# Altium PCB Project.PcbDoc (part 5 of 5)
Units mm, origin at the board's own origin, x right, y up, seen from the top; angles counter-clockwise.
Board outline 95 x 65 mm, 6 copper layers (Top Layer, L2 - GND, L3 - PWR, L4 - Sig, L5 - GND, Bottom Layer), stack 1.538 mm thick; 346 components, 317 nets, 1244 pads, 645 vias.
Unrouted connection lines stored in the file: 109.
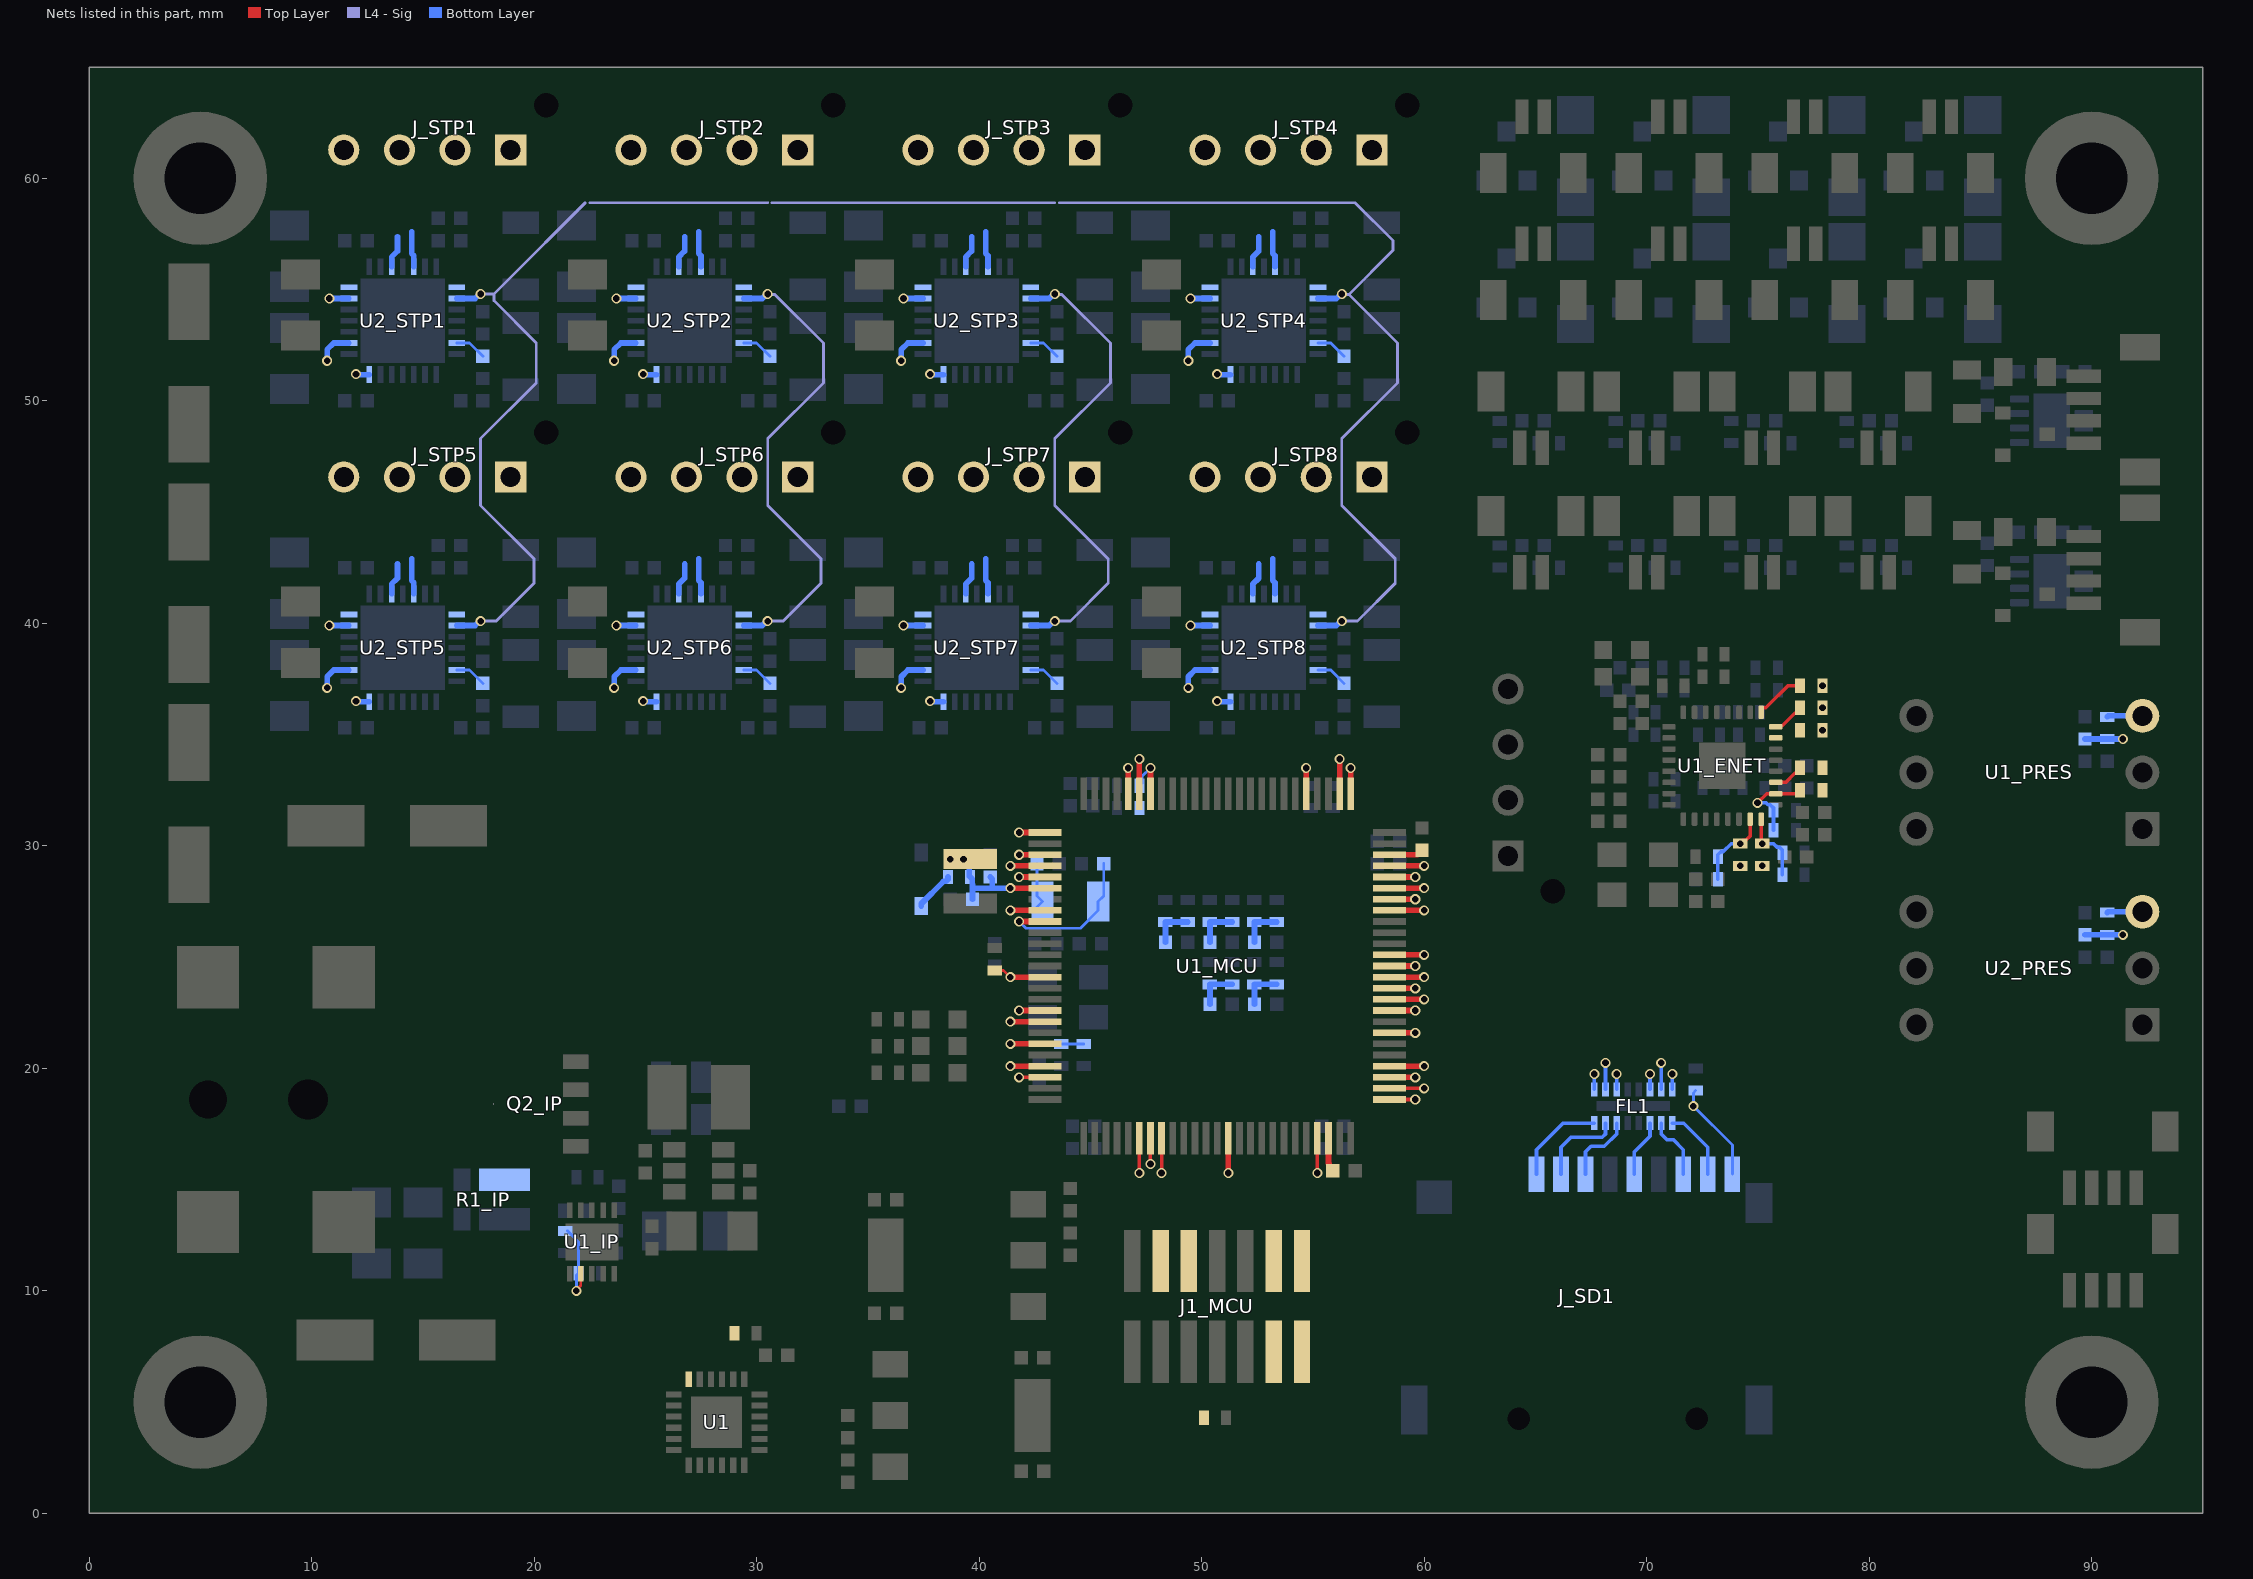
[diagram p7: the nets of this part, all layers, seen from the top]

## Via types
v1: diameter 0.45, hole 0.3, Top Layer to Bottom Layer, tented both sides, 633 vias
v2: diameter 0.55, hole 0.4, Top Layer to Bottom Layer, tented both sides, 12 vias

## Nets (pads, with @x,y where several pads share a name; then routed paths per layer and width w, separated by ;. In a path a pad name is that pad's centre, name@x,y a point inside that pad or via, vN(x,y) a via of type N, cw(c..) or ccw(c..) an arc to the next point about the centre after c; other vN are vias at no path point) (continued)
IP_UV: R2_IP.1 R4_IP.2 U1_IP.2 | length 3.8
  Top Layer w0.127: v1(21.9,10) 21.9,10.034 22.1,10.234 U1_IP.2@22.1,10.775
  Bottom Layer w0.127: R2_IP.1@21.5,12.7 22,12.2 R4_IP.2@22,10.8 21.9,10.7 v1(21.9,10)
IP_VOUT_R: Q2_IP.5 R1_IP.1
LED_RING1: U1_MCU.53 | length 1.2
  Top Layer w0.254: U1_MCU.53@58.438,19.6 v1(59.6,19.6)
LED_RING2: U1_MCU.54 | length 1.6
  Top Layer w0.254: U1_MCU.54@58.438,20.1 v1(60,20.1)
MCU_BOOT0: R5_MCU.1 R6_MCU.2 U1_MCU.94 | length 3.2
  Top Layer w0.254: U1_MCU.94@47.7,32.338 v1(47.7,33.5)
  Bottom Layer w0.127: R6_MCU.2@47.2,31.7 R5_MCU.1@47.2,32.7 47.333,32.833 47.333,33.133 v1(47.7,33.5)
MCU_RST_L: J1_MCU.12 R4_MCU.1 U1_MCU.14 | length 2.4
  Top Layer w0.127: R4_MCU.1@40.7,24.4 41.1,24.4 v1(41.4,24.1)
  Top Layer w0.254: v1(41.4,24.1) U1_MCU.14@42.962,24.1
MCU_VCAP: C7_MCU.2 C8_MCU.2 U1_MCU.48 U1_MCU.73 | length 4.3
  Top Layer w0.254: U1_MCU.48@55.7,16.862 55.7,15.743 55.727,15.716 55.727,15.573 C8_MCU.2@55.9,15.4 ; C7_MCU.2@59.6,29.6 U1_MCU.73@58.438,29.6 59.7,29.6 C7_MCU.2@59.9,29.8
OSC32_IN: C2_MCU.2 U1_MCU.8 Y1_MCU.1 | length 5
  Top Layer w0.254: v1(41.4,27.1) U1_MCU.8@42.962,27.1
  Bottom Layer w0.127: v1(41.4,27.1) 42.45,27.1 Y1_MCU.1@42.85,27.5 42.6,27.75 C2_MCU.2@42.6,29.2
OSC32_OUT: C3_MCU.2 U1_MCU.9 Y1_MCU.2 | length 7.4
  Top Layer w0.254: v1(41.8,26.6) U1_MCU.9@42.962,26.6
  Bottom Layer w0.127: v1(41.8,26.6) 42.1,26.3 44.55,26.3 45.35,27.1 Y1_MCU.2@45.35,27.5 45.6,27.75 C3_MCU.2@45.6,29.2
OUT_1N_STP1: J_STP1.4 U2_STP1.21
OUT_1N_STP2: J_STP2.4 U2_STP2.21
OUT_1N_STP3: J_STP3.4 U2_STP3.21
OUT_1N_STP4: J_STP4.4 U2_STP4.21
OUT_1N_STP5: J_STP5.4 U2_STP5.21
OUT_1N_STP6: J_STP6.4 U2_STP6.21
OUT_1N_STP7: J_STP7.4 U2_STP7.21
OUT_1N_STP8: J_STP8.4 U2_STP8.21
OUT_1P_STP1: J_STP1.3 U2_STP1.24 | length 1.5
  Bottom Layer w0.254: U2_STP1.24@13.6,56.024 13.6,56.46 13.865,56.724 13.865,57.365
OUT_1P_STP2: J_STP2.3 U2_STP2.24 | length 1.5
  Bottom Layer w0.254: U2_STP2.24@26.5,56.023 26.5,56.46 26.765,56.724 26.765,57.365
OUT_1P_STP3: J_STP3.3 U2_STP3.24 | length 1.5
  Bottom Layer w0.254: U2_STP3.24@39.4,56.023 39.4,56.46 39.665,56.724 39.665,57.365
OUT_1P_STP4: J_STP4.3 U2_STP4.24 | length 1.5
  Bottom Layer w0.254: U2_STP4.24@52.3,56.023 52.3,56.46 52.565,56.724 52.565,57.365
OUT_1P_STP5: J_STP5.3 U2_STP5.24 | length 1.5
  Bottom Layer w0.254: U2_STP5.24@13.6,41.324 13.6,41.76 13.865,42.024 13.865,42.665
OUT_1P_STP6: J_STP6.3 U2_STP6.24 | length 1.5
  Bottom Layer w0.254: U2_STP6.24@26.5,41.323 26.5,41.76 26.765,42.024 26.765,42.665
OUT_1P_STP7: J_STP7.3 U2_STP7.24 | length 1.5
  Bottom Layer w0.254: U2_STP7.24@39.4,41.323 39.4,41.76 39.665,42.024 39.665,42.665
OUT_1P_STP8: J_STP8.3 U2_STP8.24 | length 1.5
  Bottom Layer w0.254: U2_STP8.24@52.3,41.323 52.3,41.76 52.565,42.024 52.565,42.665
OUT_2N_STP1: J_STP1.1 U2_STP1.1
OUT_2N_STP2: J_STP2.1 U2_STP2.1
OUT_2N_STP3: J_STP3.1 U2_STP3.1
OUT_2N_STP4: J_STP4.1 U2_STP4.1
OUT_2N_STP5: J_STP5.1 U2_STP5.1
OUT_2N_STP6: J_STP6.1 U2_STP6.1
OUT_2N_STP7: J_STP7.1 U2_STP7.1
OUT_2N_STP8: J_STP8.1 U2_STP8.1
OUT_2P_STP1: J_STP1.2 U2_STP1.26 | length 1.6
  Bottom Layer w0.254: 14.5,57.6 14.5,56.623 14.6,56.523 U2_STP1.26@14.6,56.023
OUT_2P_STP2: J_STP2.2 U2_STP2.26 | length 1.6
  Bottom Layer w0.254: 27.4,57.6 27.4,56.623 27.5,56.523 U2_STP2.26@27.5,56.023
OUT_2P_STP3: J_STP3.2 U2_STP3.26 | length 1.6
  Bottom Layer w0.254: 40.3,57.6 40.3,56.623 40.4,56.523 U2_STP3.26@40.4,56.024
OUT_2P_STP4: J_STP4.2 U2_STP4.26 | length 1.6
  Bottom Layer w0.254: 53.2,57.6 53.2,56.623 53.3,56.523 U2_STP4.26@53.3,56.023
OUT_2P_STP5: J_STP5.2 U2_STP5.26 | length 1.6
  Bottom Layer w0.254: 14.5,42.9 14.5,41.923 14.6,41.823 U2_STP5.26@14.6,41.323
OUT_2P_STP6: J_STP6.2 U2_STP6.26 | length 1.6
  Bottom Layer w0.254: 27.4,42.9 27.4,41.923 27.5,41.823 U2_STP6.26@27.5,41.323
OUT_2P_STP7: J_STP7.2 U2_STP7.26 | length 1.6
  Bottom Layer w0.254: 40.3,42.9 40.3,41.923 40.4,41.823 U2_STP7.26@40.4,41.324
OUT_2P_STP8: J_STP8.2 U2_STP8.26 | length 1.6
  Bottom Layer w0.254: 53.2,42.9 53.2,41.923 53.3,41.823 U2_STP8.26@53.3,41.323
PHY_INT: U1_MCU.69 | length 1.2
  Top Layer w0.254: U1_MCU.69@58.438,27.6 v1(59.6,27.6)
PHY_RST: U1_MCU.57 | length 1.2
  Top Layer w0.254: U1_MCU.57@58.438,21.6 v1(59.6,21.6)
PLC_IO_EXP_RST_L: R1.1 U1.24
PRES1_OUT_R: R1_PRES.2 U1_PRES.3 | length 1.6
  Bottom Layer w0.254: R1_PRES.2@90.7,35.8 90.74,35.84 U1_PRES.3@92.28,35.84
PRES2_OUT_R: R2_PRES.2 U2_PRES.3 | length 1.6
  Bottom Layer w0.254: R2_PRES.2@90.7,27 90.74,27.04 U2_PRES.3@92.28,27.04
PRES_1: C2_PRES.2 R1_PRES.1 | length 1.7
  Bottom Layer w0.254: C2_PRES.2@89.7,34.8 R1_PRES.1@90.7,34.8 v1(91.4,34.8)
PRES_2: C4_PRES.2 R2_PRES.1 | length 1.7
  Bottom Layer w0.254: C4_PRES.2@89.7,26 R2_PRES.1@90.7,26 v1(91.4,26)
PRGMR_DETECT: J1_MCU.11 R13_MCU.1
RMII_MAC_TO_PHY_D0: R3_ENET.2 U1_MCU.51 | length 1.2
  Top Layer w0.161: U1_MCU.51@58.438,18.6 v1(59.6,18.6)
  other v1: 77.9,36.2
RMII_MAC_TO_PHY_D0_R: R3_ENET.1 U1_ENET.24 | length 1.5
  Top Layer w0.161: U1_ENET.24@75.8,35.35 75.845,35.395 76.095,35.395 76.655,35.955 76.755,35.955 76.9,36.1 R3_ENET.1@76.9,36.2
RMII_MAC_TO_PHY_D1: R4_ENET.2 U1_MCU.52 | length 1.6
  Top Layer w0.161: U1_MCU.52@58.438,19.1 v1(60,19.1)
  other v1: 77.9,37.2
RMII_MAC_TO_PHY_D1_R: R4_ENET.1 U1_ENET.25 | length 2.3
  Top Layer w0.161: U1_ENET.25@75.15,36 75.15,36.163 75.195,36.208 75.358,36.208 76.35,37.2 R4_ENET.1@76.9,37.2
RMII_MAC_TO_PHY_EN: R2_ENET.2 U1_MCU.47 | length 1.6
  Top Layer w0.161: v1(55.2,15.3) U1_MCU.47@55.2,16.862
  other v1: 77.9,35.2
RMII_MAC_TO_PHY_EN_R: R2_ENET.1 U1_ENET.23
RMII_PHY_TO_MAC_CLK: R7_ENET.2 U1_MCU.23 | length 1.2
  Top Layer w0.161: v1(41.8,19.6) U1_MCU.23@42.962,19.6
RMII_PHY_TO_MAC_CLK_R: R7_ENET.1 U1_ENET.19 | length 1.4
  Top Layer w0.161: U1_ENET.19@75.8,32.85 76.25,32.85 76.655,33.255 76.755,33.255 76.9,33.4 R7_ENET.1@76.9,33.5
RMII_PHY_TO_MAC_D0: R9_ENET.2 U1_MCU.32 | length 1.2
  Top Layer w0.161: v1(47.7,15.7) U1_MCU.32@47.7,16.862
  other v1: 75.2,29.1
RMII_PHY_TO_MAC_D0_R: R9_ENET.1 R25_ENET.1 R35_ENET.2 U1_ENET.16 | length 3.2
  Top Layer w0.161: U1_ENET.16@75.15,31.2 75.15,30.15 v1(75.2,30.1)
  Bottom Layer w0.161: v1(75.2,30.1) 75.7,30.1 75.855,29.945 75.955,29.945 76.1,29.8 R25_ENET.1@76.1,29.7 R35_ENET.2@76.1,28.7
RMII_PHY_TO_MAC_D1: R10_ENET.2 U1_MCU.33 | length 1.6
  Top Layer w0.161: v1(48.2,15.3) U1_MCU.33@48.2,16.862
  other v1: 74.2,29.1
RMII_PHY_TO_MAC_D1_R: R10_ENET.1 R19_ENET.1 R29_ENET.2 U1_ENET.15 | length 3.7
  Top Layer w0.161: v1(74.2,30.1) 74.345,30.245 74.45,30.245 74.65,30.444 U1_ENET.15@74.65,31.2
  Bottom Layer w0.161: R29_ENET.2@73.2,28.5 R19_ENET.1@73.2,29.5 73.2,29.6 73.345,29.745 73.445,29.745 73.8,30.1 v1(74.2,30.1)
RMII_PHY_TO_MAC_DV: R6_ENET.2 U1_MCU.31 | length 1.6
  Top Layer w0.161: v1(47.2,15.3) U1_MCU.31@47.2,16.862
RMII_PHY_TO_MAC_DV_R: R6_ENET.1 R21_ENET.1 R31_ENET.2 U1_ENET.18 | length 4
  Top Layer w0.161: v1(74.982,31.935) 75.391,32.344 75.794,32.344 U1_ENET.18@75.8,32.35 76.755,32.35 76.9,32.495 R6_ENET.1@76.9,32.5
  Bottom Layer w0.161: v1(74.982,31.935) 75.365,31.935 75.455,31.845 75.555,31.845 75.7,31.7 R31_ENET.2@75.7,30.7
SD_CD_L: J_SD1.9 R51.1 | length 4.5
  Bottom Layer w0.127: R51.1@72.2,19 72.1,18.9 v1(72.1,18.3) 73.85,16.55 J_SD1.9@73.85,15.25
SD_CLK: FL1.14 | length 0.7
  Bottom Layer w0.161: FL1.14@70.15,19.06 v1(70.15,19.75)
SD_CLK_R: FL1.3 J_SD1.5 | length 2.6
  Bottom Layer w0.161: J_SD1.5@69.45,15.25 69.45,16.25 70.15,16.95 FL1.3@70.15,17.54
SD_CMD: FL1.11 | length 0.7
  Bottom Layer w0.161: FL1.11@68.65,19.06 v1(68.65,19.75)
SD_CMD_R: FL1.6 J_SD1.3 | length 3.2
  Bottom Layer w0.161: J_SD1.3@67.25,15.25 67.25,16.25 67.5,16.5 68.1,16.5 68.65,17.05 FL1.6@68.65,17.54
SD_DATA0: FL1.15 | length 1.2
  Bottom Layer w0.161: FL1.15@70.65,19.06 v1(70.65,20.25)
SD_DATA0_R: FL1.2 J_SD1.7 | length 2.9
  Bottom Layer w0.161: FL1.2@70.65,17.54 70.65,17.05 70.9,16.8 71.2,16.8 71.65,16.35 J_SD1.7@71.65,15.25
SD_DATA1: FL1.16 | length 0.7
  Bottom Layer w0.161: FL1.16@71.15,19.06 v1(71.15,19.75)
SD_DATA1_R: FL1.1 J_SD1.8 | length 3.3
  Bottom Layer w0.161: FL1.1@71.15,17.54 71.66,17.54 72.75,16.45 J_SD1.8@72.75,15.25
SD_DATA2: FL1.9 | length 0.7
  Bottom Layer w0.161: FL1.9@67.65,19.06 v1(67.65,19.75)
SD_DATA2_R: FL1.8 J_SD1.1 | length 4.2
  Bottom Layer w0.161: J_SD1.1@65.05,15.25 65.05,16.35 66.24,17.54 FL1.8@67.65,17.54
SD_DATA3: FL1.10 | length 1.2
  Bottom Layer w0.161: FL1.10@68.15,19.06 v1(68.15,20.25)
SD_DATA3_R: FL1.7 J_SD1.2 | length 3.9
  Bottom Layer w0.161: J_SD1.2@66.15,15.25 66.15,16.45 66.6,16.9 68,16.9 68.15,17.05 FL1.7@68.15,17.54
STBY_STP1: U2_STP1.20 | length 0.9
  Bottom Layer w0.254: v1(10.8,54.6) U2_STP1.20@11.677,54.6
STBY_STP2: U2_STP2.20 | length 0.9
  Bottom Layer w0.254: v1(23.7,54.6) U2_STP2.20@24.577,54.6
STBY_STP3: U2_STP3.20 | length 0.9
  Bottom Layer w0.254: v1(36.6,54.6) U2_STP3.20@37.477,54.6
STBY_STP4: U2_STP4.20 | length 0.9
  Bottom Layer w0.254: v1(49.5,54.6) U2_STP4.20@50.377,54.6
STBY_STP5: U2_STP5.20 | length 0.9
  Bottom Layer w0.254: v1(10.8,39.9) U2_STP5.20@11.677,39.9
STBY_STP6: U2_STP6.20 | length 0.9
  Bottom Layer w0.254: v1(23.7,39.9) U2_STP6.20@24.577,39.9
STBY_STP7: U2_STP7.20 | length 0.9
  Bottom Layer w0.254: v1(36.6,39.9) U2_STP7.20@37.477,39.9
STBY_STP8: U2_STP8.20 | length 0.9
  Bottom Layer w0.254: v1(49.5,39.9) U2_STP8.20@50.377,39.9
STEP1: U2_STP1.16 | length 1.6
  Bottom Layer w0.254: v1(10.7,51.8) 10.7,52.3 11,52.6 U2_STP1.16@11.677,52.6
STEP2: U2_STP2.16 | length 1.6
  Bottom Layer w0.254: v1(23.6,51.8) 23.6,52.3 23.9,52.6 U2_STP2.16@24.577,52.6
STEP3: U2_STP3.16 | length 1.6
  Bottom Layer w0.254: v1(36.5,51.8) 36.5,52.3 36.8,52.6 U2_STP3.16@37.477,52.6
STEP4: U2_STP4.16 | length 1.6
  Bottom Layer w0.254: v1(49.4,51.8) 49.4,52.3 49.7,52.6 U2_STP4.16@50.377,52.6
STEP5: U2_STP5.16 | length 1.6
  Bottom Layer w0.254: v1(10.7,37.1) 10.7,37.6 11,37.9 U2_STP5.16@11.677,37.9
STEP6: U2_STP6.16 | length 1.6
  Bottom Layer w0.254: v1(23.6,37.1) 23.6,37.6 23.9,37.9 U2_STP6.16@24.577,37.9
STEP7: U2_STP7.16 | length 1.6
  Bottom Layer w0.254: v1(36.5,37.1) 36.5,37.6 36.8,37.9 U2_STP7.16@37.477,37.9
STEP8: U2_STP8.16 | length 1.6
  Bottom Layer w0.254: v1(49.4,37.1) 49.4,37.6 49.7,37.9 U2_STP8.16@50.377,37.9
STEP_AUX: U1_MCU.96 | length 1.2
  Top Layer w0.254: U1_MCU.96@46.7,32.338 v1(46.7,33.5)
STEP_R1: U1_MCU.80 | length 1.2
  Top Layer w0.254: U1_MCU.80@54.7,32.338 v1(54.7,33.5)
STEP_R2: U1_MCU.95 | length 1.6
  Top Layer w0.254: U1_MCU.95@47.2,32.338 v1(47.2,33.9)
STEP_X: U1_MCU.39 | length 1.6
  Top Layer w0.254: v1(51.2,15.3) U1_MCU.39@51.2,16.862
STEP_Y1: U1_MCU.77 | length 1.6
  Top Layer w0.254: U1_MCU.77@56.2,32.338 v1(56.2,33.9)
STEP_Y2: U1_MCU.63 | length 1.2
  Top Layer w0.254: U1_MCU.63@58.438,24.6 v1(59.6,24.6)
STEP_Z1: U1_MCU.22 | length 1.6
  Top Layer w0.254: v1(41.4,20.1) U1_MCU.22@42.962,20.1
STEP_Z2: U1_MCU.64 | length 1.6
  Top Layer w0.254: U1_MCU.64@58.438,25.1 v1(60,25.1)
STP_EN_L: U2_STP1.2 U2_STP2.2 U2_STP3.2 U2_STP4.2 U2_STP5.2 U2_STP6.2 U2_STP7.2 U2_STP8.2 | length 132.3
  L4 - Sig w0.127: v1(17.6,40.1) 18.3,40.1 20,41.8 20,42.9 17.6,45.3 17.6,48.3 20.1,50.8 20.1,52.6 18.2,54.5 18.2,54.8 ; v1(17.6,54.8) 18.2,54.8 ; 22.3,58.9 18.7,55.3 18.2,54.8 ; 22.5,58.9 30.5,58.9 ; v1(30.5,40.1) 31.2,40.1 32.9,41.8 32.9,42.9 30.5,45.3 30.5,48.3 33,50.8 33,52.6 30.817,54.783 30.517,54.783 v1(30.5,54.8) ; 30.7,58.9 43.4,58.9 ; v1(43.4,40.1) 44.1,40.1 45.8,41.8 45.8,42.9 43.4,45.3 43.4,48.3 45.9,50.8 45.9,52.6 43.717,54.783 43.417,54.783 v1(43.4,54.8) ; 43.6,58.9 56.9,58.9 58.6,57.2 58.6,56.766 56.617,54.783 ; v1(56.3,40.1) 57,40.1 58.7,41.8 58.7,42.9 56.3,45.3 56.3,48.3 58.8,50.8 58.8,52.6 56.617,54.783 ; v1(56.3,54.8) 56.317,54.783 56.617,54.783
  Bottom Layer w0.254: U2_STP5.2@16.523,39.9 17.353,39.9 17.553,40.1 v1(17.6,40.1) ; U2_STP1.2@16.523,54.6 17.353,54.6 17.553,54.8 v1(17.6,54.8) ; U2_STP6.2@29.423,39.9 30.253,39.9 30.453,40.1 v1(30.5,40.1) ; U2_STP2.2@29.423,54.6 30.253,54.6 30.453,54.8 v1(30.5,54.8) ; U2_STP7.2@42.323,39.9 43.153,39.9 43.353,40.1 v1(43.4,40.1) ; U2_STP3.2@42.323,54.6 43.153,54.6 43.353,54.8 v1(43.4,54.8) ; U2_STP8.2@55.223,39.9 56.053,39.9 56.253,40.1 v1(56.3,40.1) ; U2_STP4.2@55.223,54.6 56.053,54.6 56.253,54.8 v1(56.3,54.8)
SWCLK: J1_MCU.6 U1_MCU.76 | length 1.2
  Top Layer w0.254: U1_MCU.76@56.7,32.338 v1(56.7,33.5)
SWDIO: J1_MCU.4 U1_MCU.72 | length 1.6
  Top Layer w0.254: U1_MCU.72@58.438,29.1 v1(60,29.1)
THERM: U1_MCU.18 | length 1.6
  Top Layer w0.254: v1(41.4,22.1) U1_MCU.18@42.962,22.1
TMC_CS: U1_MCU.3 | length 1.2
  Top Layer w0.254: v1(41.8,29.6) U1_MCU.3@42.962,29.6
TMC_MISO: U1_MCU.4 | length 1.6
  Top Layer w0.254: v1(41.4,29.1) U1_MCU.4@42.962,29.1
TMC_MOSI: U1_MCU.5 | length 1.2
  Top Layer w0.254: v1(41.8,28.6) U1_MCU.5@42.962,28.6
TMC_SCK: U1_MCU.1 | length 1.2
  Top Layer w0.254: v1(41.8,30.6) U1_MCU.1@42.962,30.6
UART_BANK1: U2_STP1.14 U2_STP4.14 | length 1.2
  Bottom Layer w0.254: v1(12,51.2) 12.023,51.177 U2_STP1.14@12.6,51.177 ; v1(50.7,51.2) 50.723,51.177 U2_STP4.14@51.3,51.177
UART_BANK2: U2_STP5.14 U2_STP6.14 U2_STP7.14 U2_STP8.14 | length 2.4
  Bottom Layer w0.254: v1(12,36.5) 12.023,36.477 U2_STP5.14@12.6,36.477 ; v1(24.9,36.5) 24.923,36.477 U2_STP6.14@25.5,36.477 ; v1(37.8,36.5) 37.823,36.477 U2_STP7.14@38.4,36.477 ; v1(50.7,36.5) 50.723,36.477 U2_STP8.14@51.3,36.477
UART_MCU_TO_PRGMR: J1_MCU.14
UART_PRGMR_TO_MCU: J1_MCU.13
UART_STP2: U2_STP2.14 | length 0.6
  Bottom Layer w0.254: v1(24.9,51.2) 24.923,51.177 U2_STP2.14@25.5,51.177
UART_STP3: U2_STP3.14 | length 0.6
  Bottom Layer w0.254: v1(37.8,51.2) 37.823,51.177 U2_STP3.14@38.4,51.177
USB_DM: U1_MCU.70 | length 1.6
  Top Layer w0.254: U1_MCU.70@58.438,28.1 v1(60,28.1)
USB_DP: U1_MCU.71 | length 1.2
  Top Layer w0.254: U1_MCU.71@58.438,28.6 v1(59.6,28.6)
USB_VBUS: U1_MCU.68 | length 1.6
  Top Layer w0.254: U1_MCU.68@58.438,27.1 v1(60,27.1)
V_COIN: B1_MCU.1 C1_MCU.2 C19_MCU.2 R1_MCU.1 U1_MCU.6 | length 7
  Top Layer w0.127: v1(38.7,29.4) v1(39.3,29.4)
  Top Layer w0.254: v1(41.4,28.1) U1_MCU.6@42.962,28.1
  Bottom Layer w0.254: v1(38.7,29.4) v1(39.3,29.4) 39.56,29.14 39.56,28.64 R1_MCU.1@39.6,28.6 39.698,28.502 39.698,28.255 39.7,28.253 39.7,28.175 ; C1_MCU.2@39.7,27.6 39.7,28.175 ; C19_MCU.2@40.5,28.6 40.588,28.512 40.588,28.1 ; v1(41.4,28.1) 40.588,28.1 ; 39.7,28.175 39.775,28.1 40.588,28.1
V_COIN_R: D1_MCU.1 R1_MCU.2 | length 1.9
  Bottom Layer w0.254: D1_MCU.1@37.4,27.3 37.4,27.4 38.402,28.402 38.502,28.402 38.6,28.5 R1_MCU.2@38.6,28.6
VALVE_BLOW: U1_MCU.61 | length 1.2
  Top Layer w0.254: U1_MCU.61@58.438,23.6 v1(59.6,23.6)
VALVE_SPARE: U1_MCU.62 | length 1.6
  Top Layer w0.254: U1_MCU.62@58.438,24.1 v1(60,24.1)
VALVE_VAC1: U1_MCU.59 | length 1.2
  Top Layer w0.254: U1_MCU.59@58.438,22.6 v1(59.6,22.6)
VALVE_VAC2: U1_MCU.60 | length 1.6
  Top Layer w0.254: U1_MCU.60@58.438,23.1 v1(60,23.1)
VCP_STP1: C4_STP1.1 U2_STP1.6 | length 1.4
  Bottom Layer w0.127: U2_STP1.6@16.523,52.6 17.1,52.6 C4_STP1.1@17.7,52
VCP_STP2: C4_STP2.1 U2_STP2.6 | length 1.4
  Bottom Layer w0.127: U2_STP2.6@29.423,52.6 30,52.6 C4_STP2.1@30.6,52
VCP_STP3: C4_STP3.1 U2_STP3.6 | length 1.4
  Bottom Layer w0.127: U2_STP3.6@42.323,52.6 42.9,52.6 C4_STP3.1@43.5,52
VCP_STP4: C4_STP4.1 U2_STP4.6 | length 1.4
  Bottom Layer w0.127: U2_STP4.6@55.223,52.6 55.8,52.6 C4_STP4.1@56.4,52
VCP_STP5: C4_STP5.1 U2_STP5.6 | length 1.4
  Bottom Layer w0.127: U2_STP5.6@16.523,37.9 17.1,37.9 C4_STP5.1@17.7,37.3
VCP_STP6: C4_STP6.1 U2_STP6.6 | length 1.4
  Bottom Layer w0.127: U2_STP6.6@29.423,37.9 30,37.9 C4_STP6.1@30.6,37.3
VCP_STP7: C4_STP7.1 U2_STP7.6 | length 1.4
  Bottom Layer w0.127: U2_STP7.6@42.323,37.9 42.9,37.9 C4_STP7.1@43.5,37.3
VCP_STP8: C4_STP8.1 U2_STP8.6 | length 1.4
  Bottom Layer w0.127: U2_STP8.6@55.223,37.9 55.8,37.9 C4_STP8.1@56.4,37.3
VMON_24V: U1_MCU.17 | length 1.2
  Top Layer w0.254: v1(41.8,22.6) U1_MCU.17@42.962,22.6
VREF_MCU: R7_MCU.1 R8_MCU.2 U1_MCU.20 | length 4.9
  Top Layer w0.254: v1(41.4,21.1) U1_MCU.20@42.962,21.1
  Bottom Layer w0.127: v1(41.4,21.1) R8_MCU.2@44.7,21.1
VSNS_3V3_LOGIC: C16_PWR.1 R7_PWR.1 R10_PWR.2 | length 1.9
  Bottom Layer w0.254: C16_PWR.1@50.375,22.875 R7_PWR.1@50.375,23.775 R10_PWR.2@51.375,23.775
VSNS_3V3_MCU: C15_PWR.1 R6_PWR.1 R9_PWR.2 | length 1.9
  Bottom Layer w0.254: C15_PWR.1@52.375,22.875 52.375,23.55 R6_PWR.1@52.375,23.775 R9_PWR.2@53.375,23.775
VSNS_5V0_LOGIC: C14_PWR.1 R5_PWR.1 R8_PWR.2 | length 1.9
  Bottom Layer w0.254: C14_PWR.1@52.375,25.675 R5_PWR.1@52.375,26.575 R8_PWR.2@53.375,26.575
VSNS_24V_IN: C12_PWR.1 R1_PWR.1 R3_PWR.2 | length 1.9
  Bottom Layer w0.254: C12_PWR.1@48.375,25.675 R1_PWR.1@48.375,26.575 R3_PWR.2@49.375,26.575
VSNS_24V_MAIN: C13_PWR.1 R2_PWR.1 R4_PWR.2 | length 1.9
  Bottom Layer w0.254: C13_PWR.1@50.375,25.675 R2_PWR.1@50.375,26.575 R4_PWR.2@51.375,26.575
pads on no net: J1_ENET.H1 J1_I2C.M J1_MCU.1 J1_MCU.2 J1_MCU.8 J1_MCU.9 J1_MCU.10 J1_PWR.M J2_I2C.M J_BTN1.M J_BTN2.M J_BTN3.M J_BTN4.M J_BTN5.M J_BTN6.M J_BTN7.M J_BTN8.M J_CAN0.M J_CAN1.M J_COIL1.M J_COIL2.M J_COIL3.M J_COIL4.M J_COIL5.M J_COIL6.M J_COIL7.M J_COIL8.M J_SD1.M1 J_SD1.M2 J_STP1.H1 J_STP2.H1 J_STP3.H1 J_STP4.H1 J_STP5.H1 J_STP6.H1 J_STP7.H1 J_STP8.H1 U1.1 U1.2 U1.3 U1.4 U1.5 U1.6 U1.7 U1.8 U1.10 U1.11 U1.12 U1.13 U1.14 U1.15 U1.16 U1.17 U1.22 U1_ENET.20 U1_ENET.21 U1_ENET.22 U1_ENET.26 U1_ENET.27 U1_MCU.15 U1_MCU.28 U1_MCU.29 U1_MCU.67 U1_MCU.84 U1_MCU.88 U1_PRES.1 U1_PRES.4 U1_PRES.5 U2_PRES.1 U2_PRES.4 U2_PRES.5 U2_STP1.7 U2_STP1.12 U2_STP1.17 U2_STP1.25 U2_STP2.7 U2_STP2.12 U2_STP2.17 U2_STP2.25 U2_STP3.7 U2_STP3.12 U2_STP3.17 U2_STP3.25 U2_STP4.7 U2_STP4.12 U2_STP4.17 U2_STP4.25 U2_STP5.7 U2_STP5.12 U2_STP5.17 U2_STP5.25 U2_STP6.7 U2_STP6.12 U2_STP6.17 U2_STP6.25 U2_STP7.7 U2_STP7.12 U2_STP7.17 U2_STP7.25 U2_STP8.7 U2_STP8.12 U2_STP8.17 U2_STP8.25
copper on no net: | length 7.4
  Top Layer w0.254: v1(41.8,23.6) 42.962,23.6 ; v1(45.7,15.7) 45.7,16.862 ; v1(46.2,15.3) 46.2,16.862 ; 50.7,32.338 v1(50.7,33.5) ; 52.7,32.338 v1(52.7,33.5) ; 58.438,26.6 v1(59.6,26.6)

## Polygon pours and split planes (outlines as drawn)
IP_SOURCE on Bottom Layer "PolygonDirect" (solid, pour order 87): 20.75,21.1 20.75,17.25 22.1,15.9 23.2,15.9 24.1,16.8 24.1,20.5 23.5,21.1
24V_MAIN on Bottom Layer "PolygonDirect" (solid, pour order 88): 11.3,12.5 17.3,12.5 17.3,14.1 20.6,14.1 20.6,9.2 11.3,9.2
5V0_LOGIC on Bottom Layer "PolygonDirect" (solid, pour order 89): 24.4,16.8 26.4,16.8 26.4,20.5 24.4,20.5
IP_VOUT_R on Bottom Layer "PolygonDirect" (solid, pour order 126): 21.1,14.9 20.5,14.3 16.95,14.3 15.5,15.75 15.5,21.05 21.1,21.05
24V_MAIN on Bottom Layer "PolygonDirect" (solid, pour order 129): 24.5,11.5 27,11.5 27,13.9 24.5,13.9
GND on Bottom Layer "NONET_L-01_P-001" (solid, pour order 127): 0,65 0,0 95,0 95,65
OUT_1N_STP5 on Bottom Layer "PolygonDirect" (solid, pour order 78): 11.3,40.1 12.6,40.1 12.6,47.5 11,47.5 10.1,46.6 10.1,41.3
OUT_1P_STP5 on Bottom Layer "PolygonDirect" (solid, pour order 97): 12.6,40.8 14.1,40.8 14.1,44.6 15.1,45.6 15.1,47.5 12.6,47.5
OUT_2P_STP5 on Bottom Layer "PolygonDirect" (solid, pour order 105): 14.1,40.8 15.6,40.8 15.6,44 16.4,44 17.5,45.1 17.5,47.5 14.1,47.5
OUT_2N_STP5 on Bottom Layer "PolygonDirect" (solid, pour order 125): 16,40.1 18.3,40.1 18.3,43.6 20.2,45.5 20.2,47.1 19.8,47.5 16,47.5
OUT_1P_STP6 on Bottom Layer "PolygonDirect" (solid, pour order 96): 25.5,40.8 27,40.8 27,44.6 28,45.6 28,47.5 25.5,47.5
OUT_1N_STP6 on Bottom Layer "PolygonDirect" (solid, pour order 77): 24.2,40.1 25.5,40.1 25.5,47.5 23.9,47.5 23,46.6 23,41.3
OUT_2P_STP6 on Bottom Layer "PolygonDirect" (solid, pour order 104): 27,40.8 28.5,40.8 28.5,44 29.3,44 30.4,45.1 30.4,47.5 27,47.5
OUT_1P_STP7 on Bottom Layer "PolygonDirect" (solid, pour order 95): 38.4,40.8 39.9,40.8 39.9,44.6 40.9,45.6 40.9,47.5 38.4,47.5
OUT_1N_STP7 on Bottom Layer "PolygonDirect" (solid, pour order 76): 37.1,40.1 38.4,40.1 38.4,47.5 36.8,47.5 35.9,46.6 35.9,41.3
OUT_2P_STP7 on Bottom Layer "PolygonDirect" (solid, pour order 103): 39.9,40.8 41.4,40.8 41.4,44 42.2,44 43.3,45.1 43.3,47.5 39.9,47.5
OUT_2P_STP8 on Bottom Layer "PolygonDirect" (solid, pour order 102): 52.8,40.8 54.3,40.8 54.3,44 55.1,44 56.2,45.1 56.2,47.5 52.8,47.5
OUT_1P_STP8 on Bottom Layer "PolygonDirect" (solid, pour order 94): 51.3,40.8 52.8,40.8 52.8,44.6 53.8,45.6 53.8,47.5 51.3,47.5
OUT_1N_STP8 on Bottom Layer "PolygonDirect" (solid, pour order 75): 50,40.1 51.3,40.1 51.3,47.5 49.7,47.5 48.8,46.6 48.8,41.3
OUT_2P_STP4 on Bottom Layer "PolygonDirect" (solid, pour order 101): 52.8,55.5 54.3,55.5 54.3,58.7 55.1,58.7 56.2,59.8 56.2,62.2 52.8,62.2
OUT_1P_STP4 on Bottom Layer "PolygonDirect" (solid, pour order 93): 51.3,55.5 52.8,55.5 52.8,59.3 53.8,60.3 53.8,62.2 51.3,62.2
OUT_1N_STP4 on Bottom Layer "PolygonDirect" (solid, pour order 74): 50,54.8 51.3,54.8 51.3,62.2 49.7,62.2 48.8,61.3 48.8,56
OUT_2P_STP3 on Bottom Layer "PolygonDirect" (solid, pour order 100): 39.9,55.5 41.4,55.5 41.4,58.7 42.2,58.7 43.3,59.8 43.3,62.2 39.9,62.2
OUT_1P_STP3 on Bottom Layer "PolygonDirect" (solid, pour order 92): 38.4,55.5 39.9,55.5 39.9,59.3 40.9,60.3 40.9,62.2 38.4,62.2
OUT_1N_STP3 on Bottom Layer "PolygonDirect" (solid, pour order 73): 37.1,54.8 38.4,54.8 38.4,62.2 36.8,62.2 35.9,61.3 35.9,56
OUT_1P_STP2 on Bottom Layer "PolygonDirect" (solid, pour order 91): 25.5,55.5 27,55.5 27,59.3 28,60.3 28,62.2 25.5,62.2
OUT_1N_STP2 on Bottom Layer "PolygonDirect" (solid, pour order 72): 24.2,54.8 25.5,54.8 25.5,62.2 23.9,62.2 23,61.3 23,56
OUT_2P_STP2 on Bottom Layer "PolygonDirect" (solid, pour order 99): 27,55.5 28.5,55.5 28.5,58.7 29.3,58.7 30.4,59.8 30.4,62.2 27,62.2
OUT_2P_STP1 on Bottom Layer "PolygonDirect" (solid, pour order 98): 14.1,55.5 15.6,55.5 15.6,58.7 16.4,58.7 17.5,59.8 17.5,62.2 14.1,62.2
OUT_1P_STP1 on Bottom Layer "PolygonDirect" (solid, pour order 90): 12.6,55.5 14.1,55.5 14.1,59.3 15.1,60.3 15.1,62.2 12.6,62.2
OUT_1N_STP1 on Bottom Layer "PolygonDirect" (solid, pour order 71): 11.3,54.8 12.6,54.8 12.6,62.2 11,62.2 10.1,61.3 10.1,56
24V_MAIN on Bottom Layer "PolygonDirect" (solid, pour order 86): 46.6,41.7 46.6,37.7 48.8,37.7 48.8,41.7
24V_MAIN on Bottom Layer "PolygonDirect" (solid, pour order 85): 46.6,56.4 46.6,52.4 48.8,52.4 48.8,56.4
24V_MAIN on Bottom Layer "PolygonDirect" (solid, pour order 84): 20.8,41.7 20.8,37.7 23,37.7 23,41.7
24V_MAIN on Bottom Layer "PolygonDirect" (solid, pour order 83): 7.9,41.7 7.9,37.7 10.1,37.7 10.1,41.7
24V_MAIN on Bottom Layer "PolygonDirect" (solid, pour order 82): 33.7,41.7 33.7,37.7 35.9,37.7 35.9,41.7
24V_MAIN on Bottom Layer "PolygonDirect" (solid, pour order 81): 20.8,56.4 20.8,52.4 23,52.4 23,56.4
24V_MAIN on Bottom Layer "PolygonDirect" (solid, pour order 80): 33.7,56.4 33.7,52.4 35.9,52.4 35.9,56.4
OUT_2N_STP7 on Bottom Layer "PolygonDirect" (solid, pour order 124): 41.8,40.1 44.1,40.1 44.1,43.6 46,45.5 46,47.1 45.6,47.5 41.8,47.5
OUT_2N_STP2 on Bottom Layer "PolygonDirect" (solid, pour order 123): 28.9,54.8 31.2,54.8 31.2,58.3 33.1,60.2 33.1,61.8 32.7,62.2 28.9,62.2
OUT_2N_STP3 on Bottom Layer "PolygonDirect" (solid, pour order 122): 41.8,54.8 44.1,54.8 44.1,58.3 46,60.2 46,61.8 45.6,62.2 41.8,62.2
OUT_2N_STP8 on Bottom Layer "PolygonDirect" (solid, pour order 121): 54.7,40.1 57,40.1 57,43.6 58.9,45.5 58.9,47.1 58.5,47.5 54.7,47.5
OUT_2N_STP4 on Bottom Layer "PolygonDirect" (solid, pour order 120): 54.7,54.8 57,54.8 57,58.3 58.9,60.2 58.9,61.8 58.5,62.2 54.7,62.2
OUT_2N_STP6 on Bottom Layer "PolygonDirect" (solid, pour order 119): 28.9,40.1 31.2,40.1 31.2,43.6 33.1,45.5 33.1,47.1 32.7,47.5 28.9,47.5
24V_MAIN on Bottom Layer "PolygonDirect" (solid, pour order 79): 7.9,56.4 7.9,52.4 10.1,52.4 10.1,56.4
OUT_2N_STP1 on Bottom Layer "PolygonDirect" (solid, pour order 118): 16,54.8 18.3,54.8 18.3,58.3 20.2,60.2 20.2,61.8 19.8,62.2 16,62.2
GND on Top Layer "NONET_L-01_P-001" (solid, pour order 132): 0,65 0,0 95,0 95,65
24V_IN on Top Layer "PolygonDirect" (solid, pour order 106): 2.8,26.2 2.8,16.8 3.9,15.7 15.5,15.7 21,15.7 21,20.9 15.7,26.2
24V_MAIN on Top Layer "PolygonDirect" (solid, pour order 131): 14.6,6.6 14.6,11 16.1,12.5 20.8,12.5 20.8,12.3 20.8,8.9 18.5,6.6
IP_SOURCE on Top Layer "PolygonDirect" (solid, pour order 115): 20.75,19.45 20.75,15.7 24.2,15.7 24.2,20.5 23.8,20.9 22.2,20.9
24V_MAIN on Top Layer "PolygonDirect" (solid, pour order 116): 25.5,11.6 27.4,11.6 27.4,15.8 25.6,15.8 25.6,14.9 24.6,13.9 24.6,13.5 24.6,12.5
BUCK_5V_SW on Top Layer "PolygonDirect" (solid, pour order 117): 30.1,14.9 27.5,14.9 27.5,20.5 30.1,20.5 30.1,17.5
5V0_LOGIC on Top Layer "PolygonDirect" (solid, pour order 128): 24.4,15.7 27.4,15.7 27.4,20.5 24.4,20.5
24V_MAIN on Top Layer "PolygonDirect" (solid, pour order 114): 8.1,39.7 8.1,41.9 10.6,41.9 10.6,39.7
24V_MAIN on Top Layer "PolygonDirect" (solid, pour order 113): 33.9,39.7 33.9,41.9 36.4,41.9 36.4,39.7
24V_MAIN on Top Layer "PolygonDirect" (solid, pour order 112): 21,54.4 21,56.6 23.5,56.6 23.5,54.4
24V_MAIN on Top Layer "PolygonDirect" (solid, pour order 111): 21,39.7 21,41.9 23.5,41.9 23.5,39.7
24V_MAIN on Top Layer "PolygonDirect" (solid, pour order 110): 33.9,54.4 33.9,56.6 36.4,56.6 36.4,54.4
24V_MAIN on Top Layer "PolygonDirect" (solid, pour order 109): 46.8,39.7 46.8,41.9 49.3,41.9 49.3,39.7
24V_MAIN on Top Layer "PolygonDirect" (solid, pour order 108): 46.8,54.4 46.8,56.6 49.3,56.6 49.3,54.4
24V_MAIN on Top Layer "PolygonDirect" (solid, pour order 107): 8.1,54.4 8.1,56.6 10.6,56.6 10.6,54.4
24V_MAIN on L3 - PWR "NONET_L-01_P-001" (solid, pour order 130): 0,65 0,0 95,0 95,65

## Other copper
Top Layer:
  region net 24V_IN: 20.505,16.1 15.855,16.1 15.855,16.825 16.405,16.825 16.405,17.45 15.831,17.45 15.831,18.09 16.405,18.09 16.405,18.71 15.831,18.71 15.831,19.35 16.405,19.35 16.405,19.975 15.843,19.975 15.843,20.7 20.505,20.7
Bottom Layer:
  region net IP_VOUT_R: 20.505,20.7 15.855,20.7 15.855,19.975 16.405,19.975 16.405,19.35 15.831,19.35 15.831,18.71 16.405,18.71 16.405,18.09 15.831,18.09 15.831,17.45 16.405,17.45 16.405,16.825 15.843,16.825 15.843,16.1 20.505,16.1

## Silkscreen, mask and mechanical layers (free items; w line width, h text height)
Top Solder:
  drawing of 96 lines, arcs and shapes, not listed
Board Shape:
  the board outline again, w0.254
Notes (Mech3):
  lines w0.254: 0,0 0,5 5,5 5,0 0,0 ; 0,60 5,60 5,65 0,65 0,60 ; 90,0 95,0 95,5 90,5 90,0 ; 90,60 90,65 95,65 95,60 90,60

## Dimensions
0,65 to 95,65 on Notes (Mech3)
0,65 to 0,0 on Notes (Mech3)